# Altium PCB Compuertas_PCB.PcbDoc
Units mm, origin at the board's own origin, x right, y up, seen from the top; angles counter-clockwise.
Board outline 33.27 x 39.55 mm, 2 copper layers (Top Layer, Bottom Layer); 13 components, 6 nets, 48 pads, 0 vias.
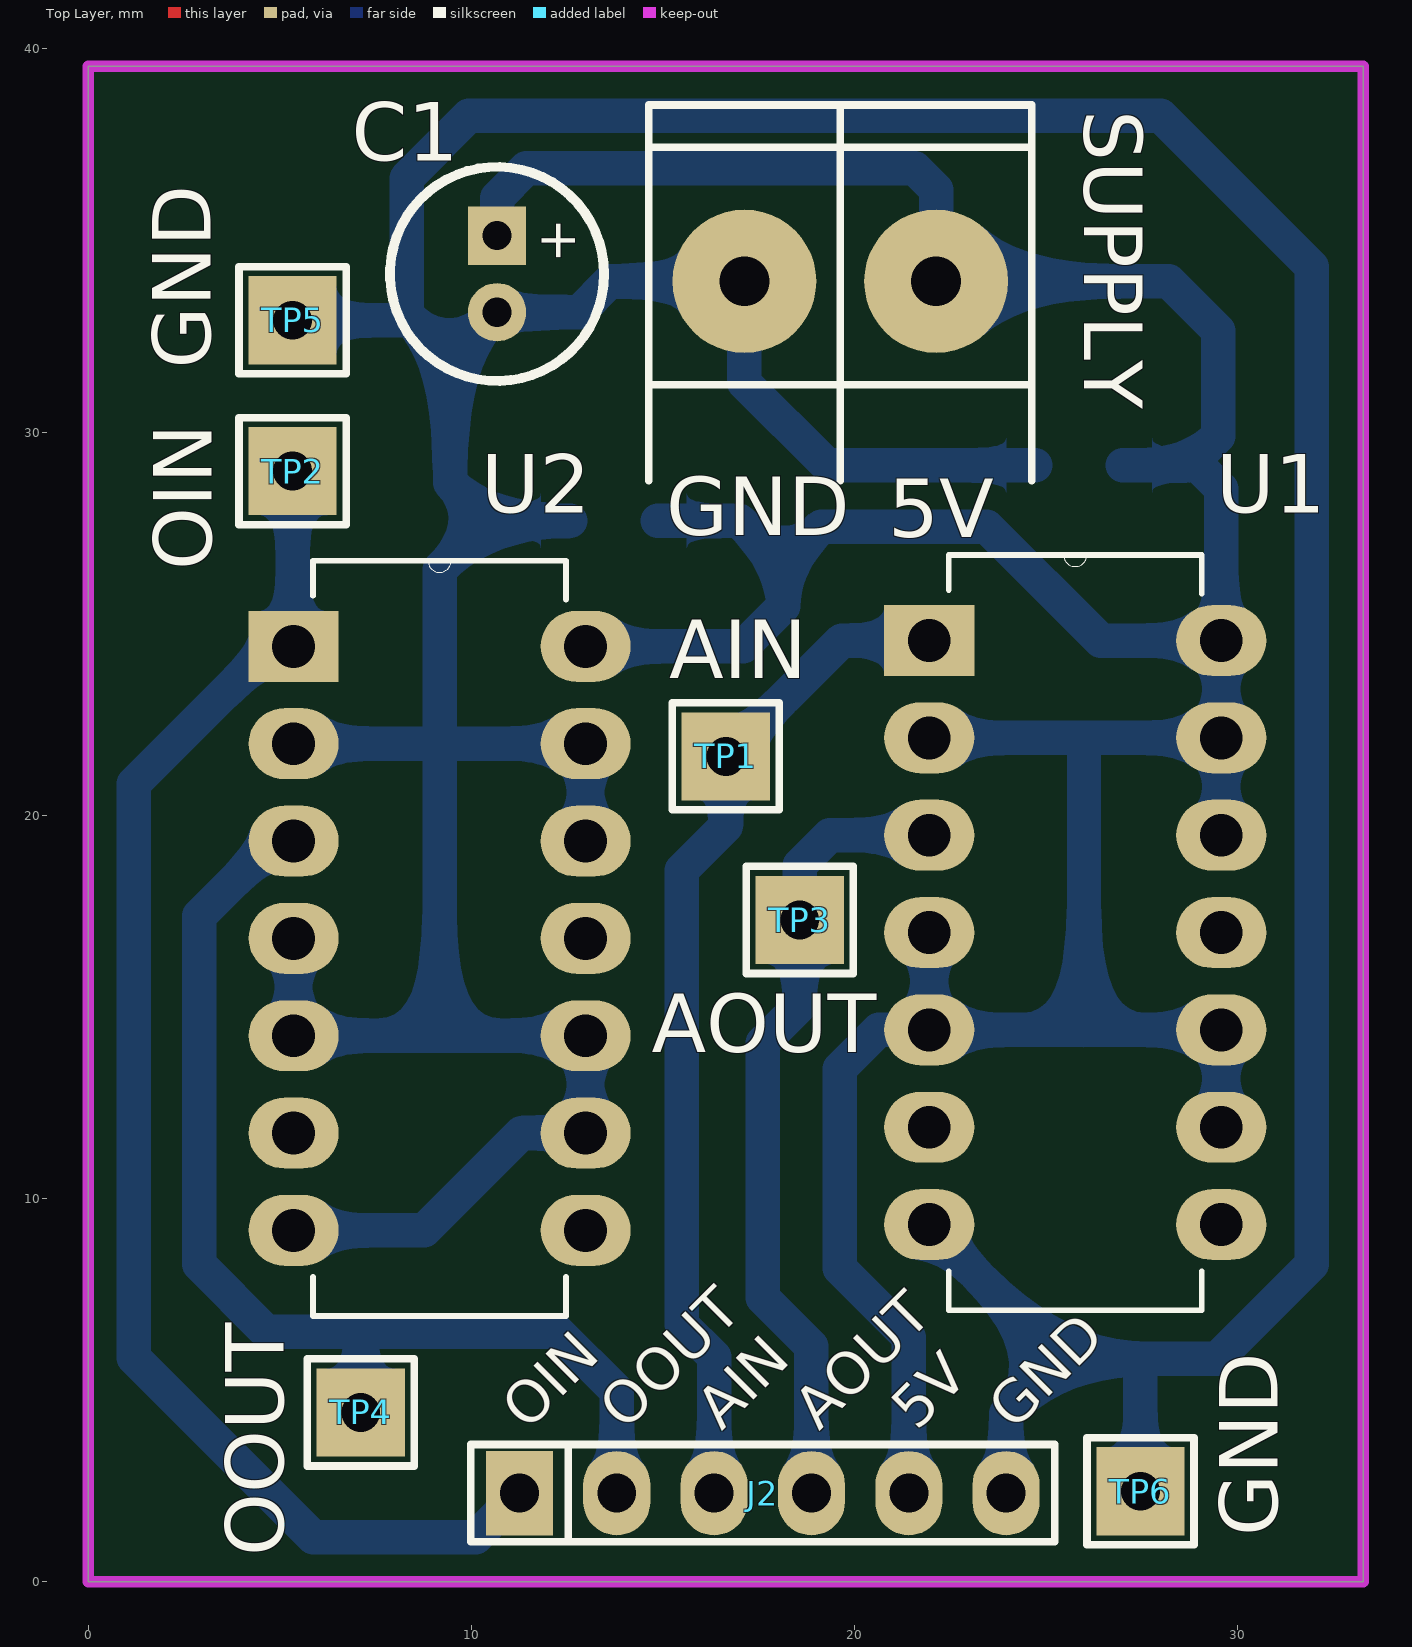
[diagram p0: Top Layer view]
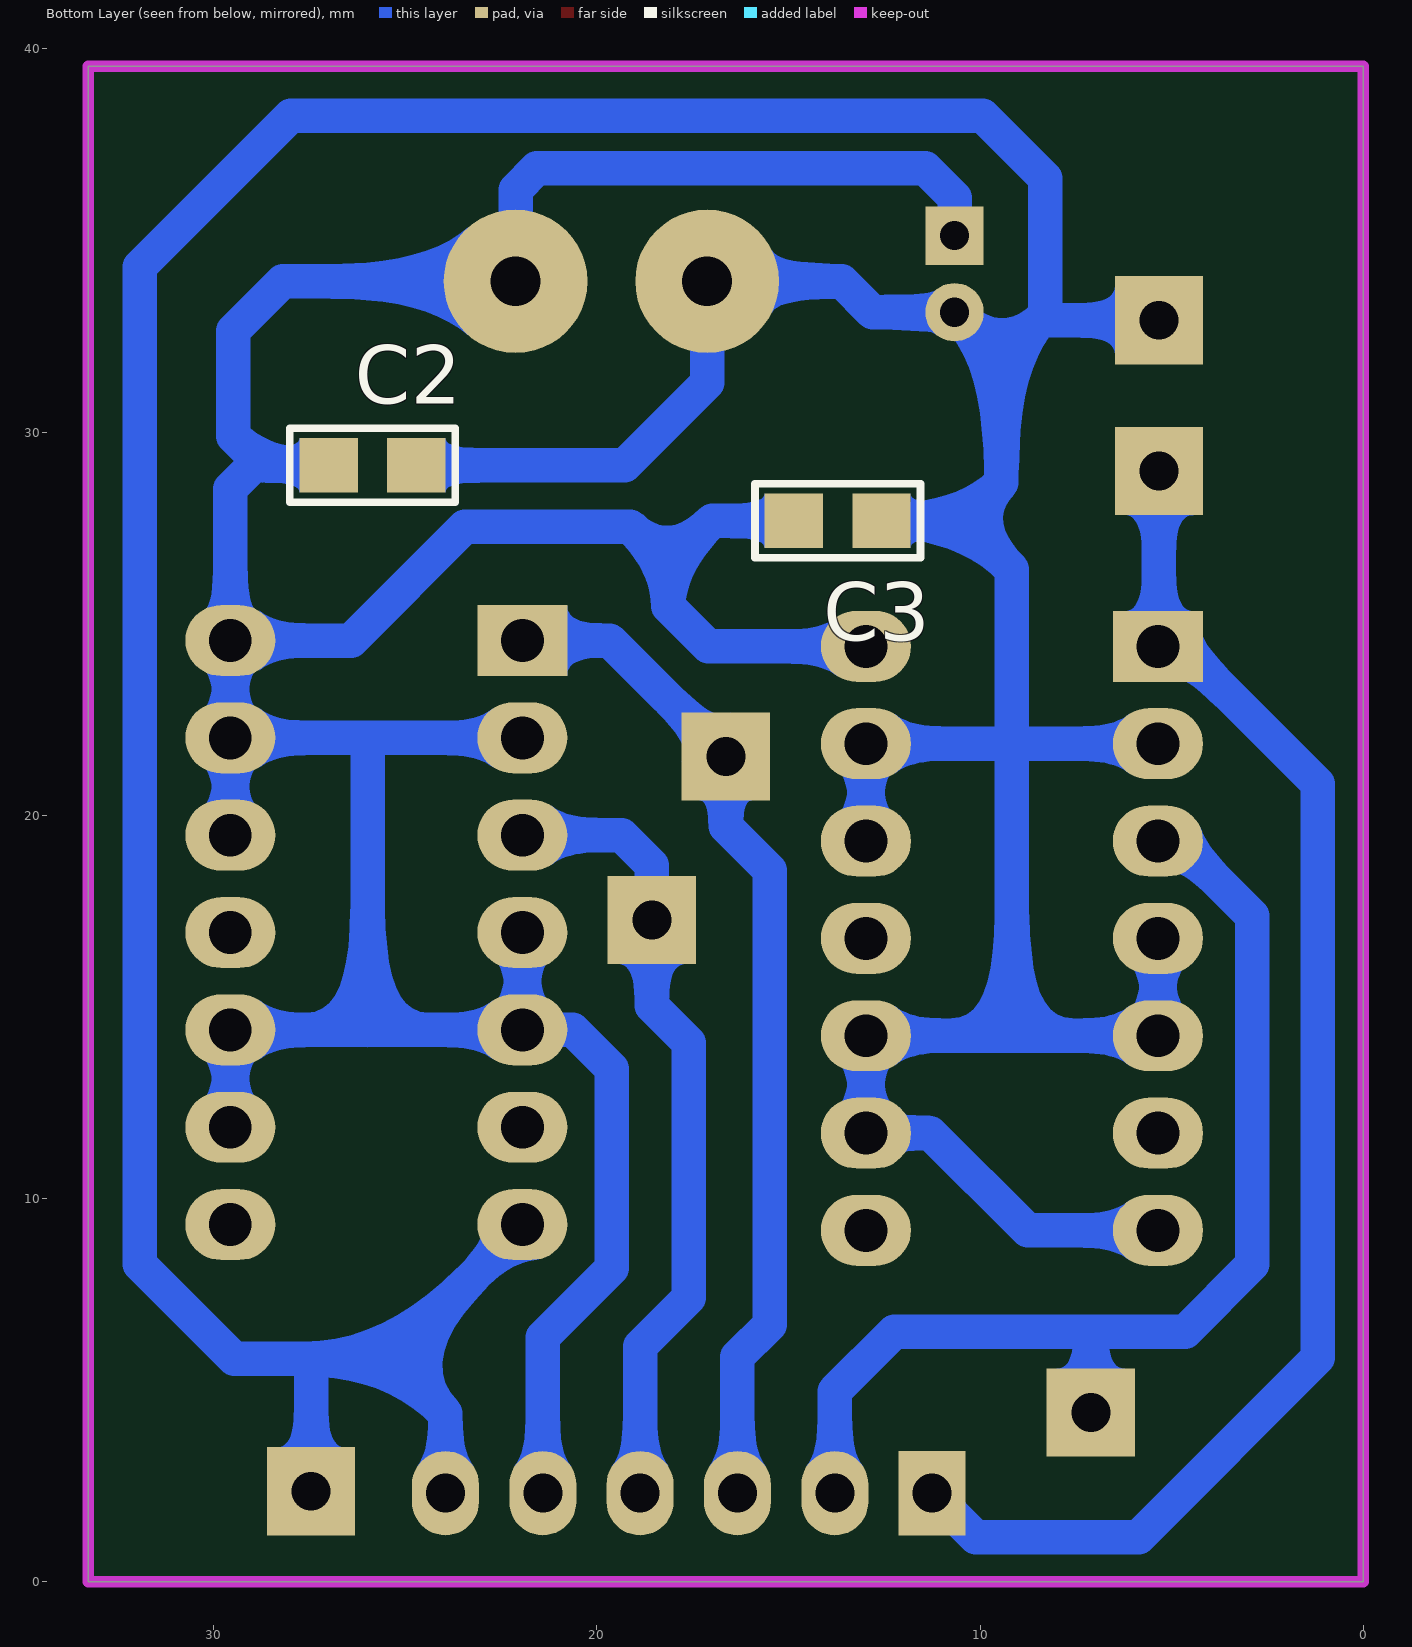
[diagram p1: Bottom Layer view, seen from below]

## Layer stack, top to bottom
Top Solder: solder mask 0.0102, Solder Resist, Dk 3.5
Top Layer: signal copper 0.0356
Dielectric 1: dielectric 0.32, FR-4, Dk 4.8
Bottom Layer: signal copper 0.0356
Bottom Solder: solder mask 0.0102, Solder Resist, Dk 3.5

## Board outline
0,0 33.274,0 33.274,39.548 0,39.548

## Design rules (kind name [scope] priority, off if disabled: settings)
Clearance [All] p1: gap=0.4
PolygonConnect [All] p1: connectstyle=Relief reliefconductorwidth=0.254 reliefentries=4 polygonreliefangle="90 Angle" airgapwidth=0.254
RoutingVias [All] p1: holewidth=0.711 width=1.27 viastyle="Through Hole" minholewidth=0.711 minwidth=1.27 maxholewidth=0.711 maxwidth=1.27
SolderMaskExpansion [All] p1: expansion=0.102
Width PowerWidth [InNetClass('Power')] p1: maxlimit=3 minlimit=1 preferedwidth=2
Width [All] p2: maxlimit=0.9 minlimit=0.6 preferedwidth=0.7
30 further rules are at their usual default settings.

## Components (designator, comment, footprint, x,y, rotation, side; value= is the part's Value field where it differs from the comment)
C1 "10uF" CAP100RP 10.668,34.128 r270 top
C2 "100nF" 0805 25.857,29.134 r180 bottom
C3 "100nF" 0805 13.716,27.686 r180 bottom
J2 "PINOUT" SIP6 11.252,2.311 r0 top
SUPPLY "5V" BORNERA2 19.623,33.934 r270 top
TP1 "AIN" TPTH 16.637,21.539 r0 top
TP2 "OIN" TPTH 5.334,28.981 r0 top
TP3 "AOUT" TPTH 18.567,17.272 r0 top
TP4 "OOUT" TPTH 7.112,4.42 r0 top
TP5 "GND" TPTH 5.334,32.918 r0 top
TP6 "GND" TPTH 27.457,2.362 r0 top
U1 "SN74LS08N" *DIP254P762X508-14 29.566,9.322 r0 top
U2 "SN74HC32N" *DIP254P762X508-14 12.979,9.169 r0 top

## Footprints (in the part's own frame and the unit in brackets; to place one, negate y for a bottom-side part, rotate by r counter-clockwise, add the part's x,y. Pads: shape width x height; smd on the part's side, far side on the other; paste and mask are expansions set on the pad)
0805 [mil] "Pasivo 0805"
  rect 60x56 smd: 1(-45,0) 2(45,0)
  silkscreen extent -85,-38 85,38, body extent -39,-25 39,25, height 15
*DIP254P762X508-14 [mm]
  rect 2.35x1.85 hole 1.118: 1(-7.62,15.24)
  oval 2.35x1.85 hole 1.118: 2(-7.62,12.7) 3(-7.62,10.16) 4(-7.62,7.62) 5(-7.62,5.08) 6(-7.62,2.54) 7(-7.62,0) 8(0,0) 9(0,2.54) 10(0,5.08) 11(0,7.62) 12(0,10.16) 13(0,12.7) 14(0,15.24)
  silkscreen extent -7.11,-2.24 -0.51,17.48
BORNERA2 [mm] "Bornera con Tornillos 5mm separación"
  round 3.75 hole 1.3: 1(0,2.5) 2(0,-2.5)
  silkscreen extent -4.6,-5 5.2,5, body extent -3.76,-4.89 3.94,5.61, height 10
CAP100RP [mil] "Body diameter 5mm"
  rect 60x60 hole 30: 1(-39.37,0)
  round 60 hole 30: 2(39.37,0)
  silkscreen extent -110,-110 110,110, body extent -99,-99 99,100, height 454
SIP6 [mm]
  rect 1.75x2.2 hole 1.016: 1(0,0)
  oval 1.75x2.2 hole 1.016: 2(2.54,0) 3(5.08,0) 4(7.62,0) 5(10.16,0) 6(12.7,0)
  silkscreen extent -1.27,-1.27 13.97,1.27, body extent -1.27,-1.3 13.97,1.24, height 8.38
TPTH [mm]
  rect 2.3x2.3 hole 1.016: 1(0,0)
  silkscreen extent -1.4,-1.4 1.4,1.4, body extent -1.27,-1.27 1.27,1.27, height 6.04

## Part data
C1: library part CAPPOL
C2 C3: library part CAP
J2: library part CON6
SUPPLY: library part BATERIA, "BATERIA"
TP1 TP2 TP3 TP4 TP5 TP6: library part TP
U1: "AND Gate 4 Element 2 Input Bipolar 14-Pin Plastic DIP Tube"
U2: "IC: digital; Channels: 4; OR; Inputs: 2; THT; DIP14; Seri"

## Nets (pads, with @x,y where several pads share a name; then routed paths per layer and width w, separated by ;. In a path a pad name is that pad's centre, name@x,y a point inside that pad or via, vN(x,y) a via of type N, cw(c..) or ccw(c..) an arc to the next point about the centre after c; other vN are vias at no path point)
CMOS_OR_IN: J2.1 TP2.1 U2.1 | length 37.7
  Bottom Layer w0.9: TP2.1 5.334,24.435 U2.1 4.775,24.409 1.194,20.828 1.194,5.842 5.867,1.168 10.109,1.168 J2.1
CMOS_OR_OUT: J2.2 TP4.1 U2.3 | length 29.4
  Bottom Layer w0.9: U2.3 4.851,19.329 2.896,17.374 2.896,8.28 4.648,6.528 7.188,6.528 ; TP4.1 7.112,6.452 7.188,6.528 ; J2.2 13.792,4.978 12.243,6.528 7.188,6.528
GND: C1.2 C2.2 C3.2 J2.6 SUPPLY.2 TP5.1 TP6.1 U1.7 U2.2 U2.4 U2.5 U2.7 U2.9 U2.10 U2.12 U2.13 | length 152.3
  Bottom Layer w0.9: TP5.1 8.179,32.918 8.306,33.045 ; U2.7 8.763,9.169 11.303,11.709 U2.9 U2.10 9.169,14.249 ; U2.4 U2.5 9.169,14.249 ; U2.2 9.169,21.869 ; C3.2 10.439,27.686 ; U2.12 U2.13 9.22,21.869 ; U1.7 21.946,9.246 25.375,5.817 ; J2.6 23.952,4.394 25.375,5.817 ; C2.2 19.279,29.134 17.123,31.289 SUPPLY.2 13.614,33.934 12.808,33.128 C1.2 9.446,31.906 ; TP6.1 27.457,5.639 27.635,5.817 ; 8.306,33.045 8.306,36.627 9.931,38.252 27.991,38.252 31.928,34.315 31.928,8.28 29.464,5.817 27.635,5.817 ; 8.306,33.045 9.446,31.906 ; 9.169,14.249 9.169,21.819 ; 9.169,21.819 9.169,21.869 ; 9.169,21.819 9.22,21.869 ; 9.169,21.869 9.169,26.416 10.439,27.686 ; 9.169,21.869 9.22,21.869 ; 9.446,31.906 9.446,28.68 10.439,27.686 ; 25.375,5.817 27.635,5.817
TTL_AND_IN: J2.3 TP1.1 U1.1 | length 26.6
  Bottom Layer w0.9: J2.3 16.332,5.867 15.494,6.706 15.494,18.567 16.637,19.71 TP1.1 19.66,24.562 U1.1
TTL_AND_OUT: J2.4 TP3.1 U1.3 | length 21
  Bottom Layer w0.9: J2.4 18.872,6.147 17.602,7.417 17.602,14.072 18.567,15.037 TP3.1 18.567,18.694 19.355,19.482 U1.3
VCC: C1.1 C2.1 C3.1 J2.5 SUPPLY.1 U1.2 U1.4 U1.5 U1.9 U1.10 U1.12 U1.13 U1.14 U2.14 | length 105
  Bottom Layer w0.9: C1.1 10.668,36.119 11.43,36.881 21.565,36.881 22.123,36.322 SUPPLY.1 28.194,33.934 29.489,32.639 29.489,29.896 28.727,29.134 ; U2.14 17.094,24.409 18.136,25.451 18.136,26.543 ; C3.1 16.993,27.686 18.136,26.543 ; J2.5 21.412,6.375 19.609,8.179 19.609,13.386 20.625,14.402 U1.5 ; U1.4 U1.5 ; U1.2 25.857,22.022 ; C2.1 28.727,29.134 ; U1.9 U1.10 25.984,14.402 ; U1.12 U1.13 ; 18.136,26.543 19.126,27.534 23.444,27.534 26.416,24.562 U1.14 ; U1.5 25.984,14.402 ; 25.857,22.022 U1.13 ; 25.857,22.022 25.984,21.895 25.984,14.402 ; 28.727,29.134 28.956,29.134 29.566,28.524 U1.14 ; U1.13 U1.14
pads on no net: U1.6 U1.8 U1.11 U2.6 U2.8 U2.11

## Keep-outs
Keep-Out Layer:
  the board outline again, w0.3

## Silkscreen, mask and mechanical layers (free items; w line width, h text height)
Top Overlay:
  text "GND" at 15.088,27.305 h1.52
  text "5V" at 20.879,27.254 h1.52
  text "OIN" at 11.455,3.912 h1.1 r45
  text "OOUT" at 13.995,3.912 h1.1 r45
  text "AIN" at 16.535,3.912 h1.1 r45
  text "AOUT" at 19.075,3.912 h1.1 r45
  text "5V" at 21.615,3.912 h1.1 r45
  text "GND" at 24.155,3.912 h1.1 r45

## Text inside footprints (layer, text, board x,y; h text height)
C1: Top Overlay "+" at 11.836,35.576 h1.02 r270